# EAGLE board charlieplate5 (EAGLE 6.2)
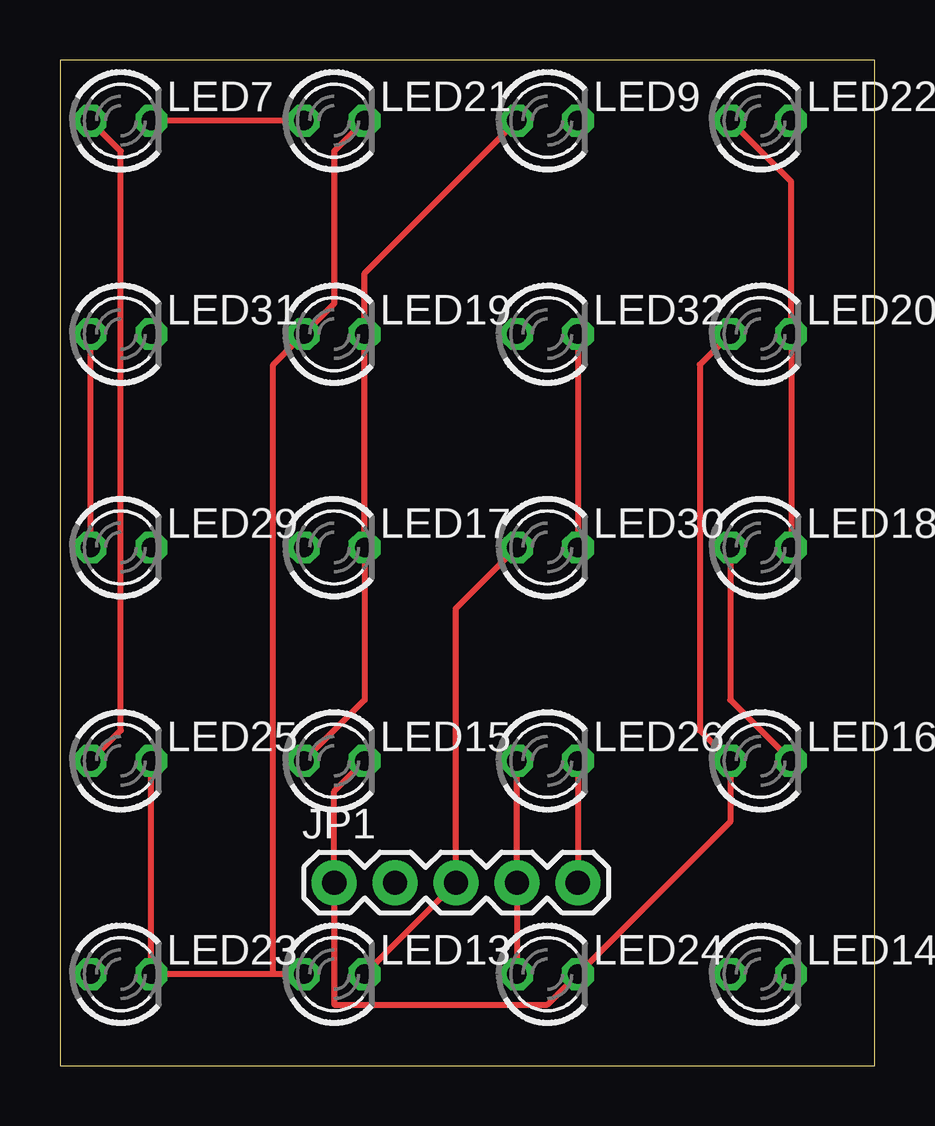
[diagram p0: board, top side]
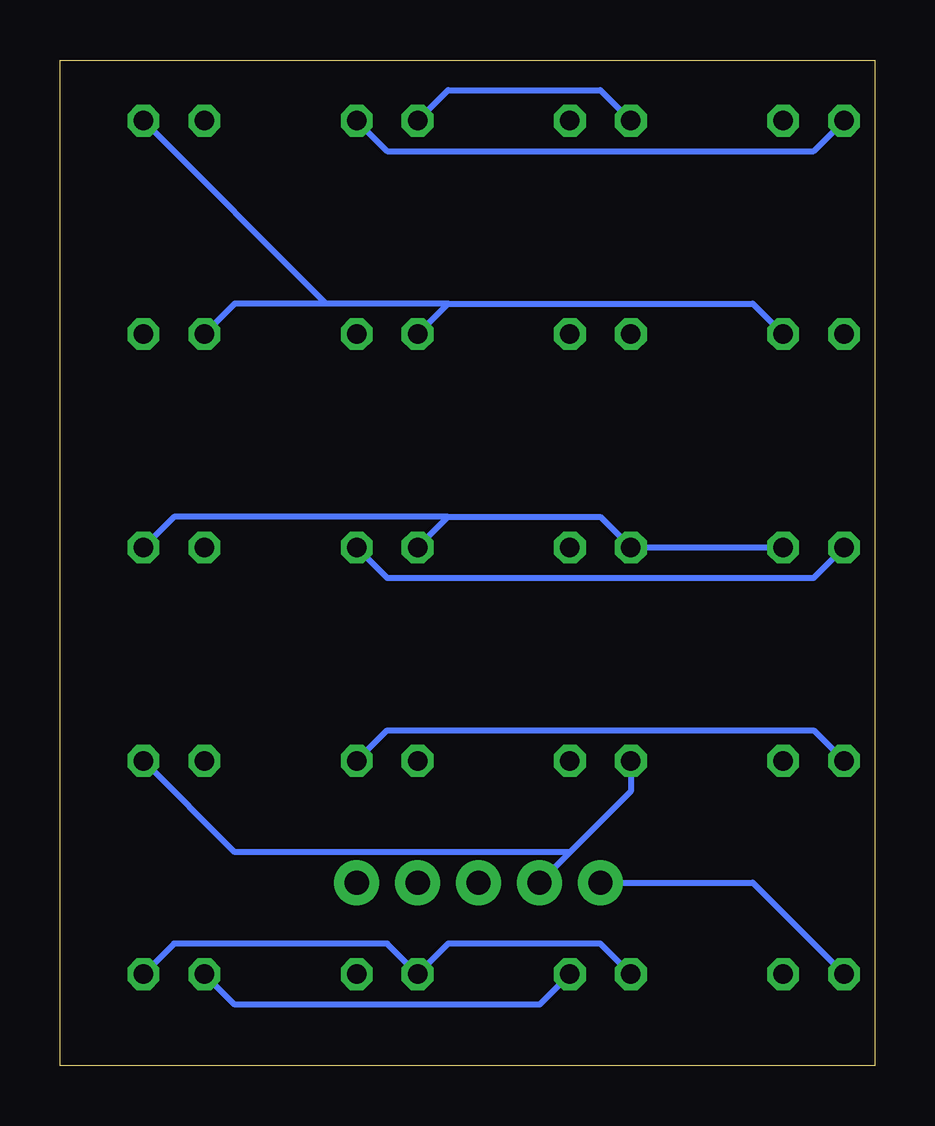
[diagram p1: board, bottom side, seen from below]

Size 33.96 x 41.9 mm. Coordinates in mm from the lower left corner, seen from the top.
Outline: 0,0 33.96,0 33.96,41.9 0,41.9 0,0
Copper layers (1*16): Top 0.035mm / dielectric 1.5mm / Bottom 0.035mm
Design rules: minimum track width 10mil, minimum drill 24mil, track to track 8mil, track to pad 8mil, pad to pad 8mil, via to via 8mil, smd to smd 8mil, copper to edge 40mil, drill to drill 8mil, minimum pad ring 10mil, minimum via ring 8mil, stop-mask expansion 4mil, vias tented up to drill 0mil, thermal gap 10mil

## Footprints (pad centres in the part's own frame; a part is rotated, then mirrored left to right if it is on the bottom)
1X05 = drill 1.016 pad 1.88: 1 0,0; 2 2.54,0; 3 5.08,0; 4 7.62,0; 5 10.16,0
LED3MM = drill 0.813 octagon: A -1.27,0; K 1.27,0

## Placement (x,y rotation side)
JP1  [1X05]  11.43,7.62 0 top
LED7  [LED3MM]  2.54,39.37 0 top
LED9  [LED3MM]  20.32,39.37 0 top
LED13  [LED3MM]  11.43,3.81 0 top
LED14  [LED3MM]  29.21,3.81 0 top
LED15  [LED3MM]  11.43,12.7 0 top
LED16  [LED3MM]  29.21,12.7 0 top
LED17  [LED3MM]  11.43,21.59 0 top
LED18  [LED3MM]  29.21,21.59 0 top
LED19  [LED3MM]  11.43,30.48 0 top
LED20  [LED3MM]  29.21,30.48 0 top
LED21  [LED3MM]  11.43,39.37 0 top
LED22  [LED3MM]  29.21,39.37 0 top
LED23  [LED3MM]  2.54,3.81 0 top
LED24  [LED3MM]  20.32,3.81 0 top
LED25  [LED3MM]  2.54,12.7 0 top
LED26  [LED3MM]  20.32,12.7 0 top
LED29  [LED3MM]  2.54,21.59 0 top
LED30  [LED3MM]  20.32,21.59 0 top
LED31  [LED3MM]  2.54,30.48 0 top
LED32  [LED3MM]  20.32,30.48 0 top

## Library data of the parts
JP1 = SparkFun
LED7 LED9 LED13-LED26 LED29-LED32 = 0-svo

## Nets
N$3: LED29.A LED30.K LED31.A LED32.K
N$5: JP1.1 LED15.K LED16.A LED20.A LED22.K LED23.A LED24.K LED31.K LED32.A
N$9: JP1.3 LED13.K LED14.A LED17.A LED18.K LED20.K LED22.A LED29.K LED30.A
N$11: JP1.4 LED13.A LED14.K LED19.A LED21.K LED23.K LED24.A LED25.K LED26.A
N$14: JP1.5 LED7.A LED9.K LED25.A LED26.K
N$16: JP1.2 LED7.K LED9.A LED15.A LED16.K LED17.K LED18.A LED19.K LED21.A

## Tracks (layer width: path | path; a pad name or v marks a point on that pad's centre or on a via)
N$3
  Top 0.254: LED31.A LED29.A | LED32.K LED30.K
  Bottom 0.254: LED29.A 2.54,20.32 20.32,20.32 LED30.K
N$5
  Top 0.254: LED15.K 11.43,11.43 JP1.1 11.43,2.54 20.32,2.54 LED24.K 27.94,10.16 LED16.A 26.67,13.97 26.67,29.21 LED20.A
  Bottom 0.254: LED23.A 5.08,7.62 JP1.1 | LED31.K 5.08,31.75 17.78,31.75 | LED32.A 17.78,31.75 | LED20.A 26.67,31.75 22.86,31.75 | 17.78,31.75 22.86,31.75 | 22.86,31.75 LED22.K
N$9
  Top 0.254: LED18.K LED20.K 30.48,36.83 LED22.A | LED13.K JP1.3 16.51,19.05 LED30.A
  Bottom 0.254: LED29.K LED17.A 11.43,22.86 17.78,22.86 | LED14.A 26.67,2.54 13.97,2.54 LED13.K | LED30.A 17.78,22.86 | LED18.K 29.21,22.86 17.78,22.86
N$11
  Top 0.254: LED24.A JP1.4 LED26.A | LED21.K 11.43,38.1 11.43,31.75 LED19.A 8.89,29.21 8.89,3.81 | LED13.A 8.89,3.81 | 8.89,3.81 LED23.K LED25.K
  Bottom 0.254: LED14.K 29.21,5.08 20.32,5.08 LED24.A 17.78,5.08 11.43,5.08 LED13.A
N$14
  Top 0.254: LED26.K JP1.5 | LED7.A 2.54,38.1 2.54,13.97 LED25.A
  Bottom 0.254: LED7.A 2.54,38.1 20.32,38.1 LED9.K | LED25.A 2.54,13.97 20.32,13.97 LED26.K
N$16
  Top 0.254: LED16.K 27.94,15.24 LED18.A | LED21.A LED7.K | LED15.A 12.7,15.24 LED17.K LED19.K 12.7,33.02 LED9.A
  Bottom 0.254: 12.7,8.89 10.16,11.43 LED15.A | 12.7,8.89 JP1.2 | LED21.A 11.43,40.64 17.78,40.64 LED9.A | LED16.K 26.67,8.89 12.7,8.89